# Altium PCB BRCM-V2-Master.PcbDoc
Units mm, origin at the board's own origin, x right, y up, seen from the top; angles counter-clockwise.
Board outline 80 x 80 mm, 2 copper layers (Top Layer, Bottom Layer); 95 components, 69 nets, 366 pads, 166 vias.
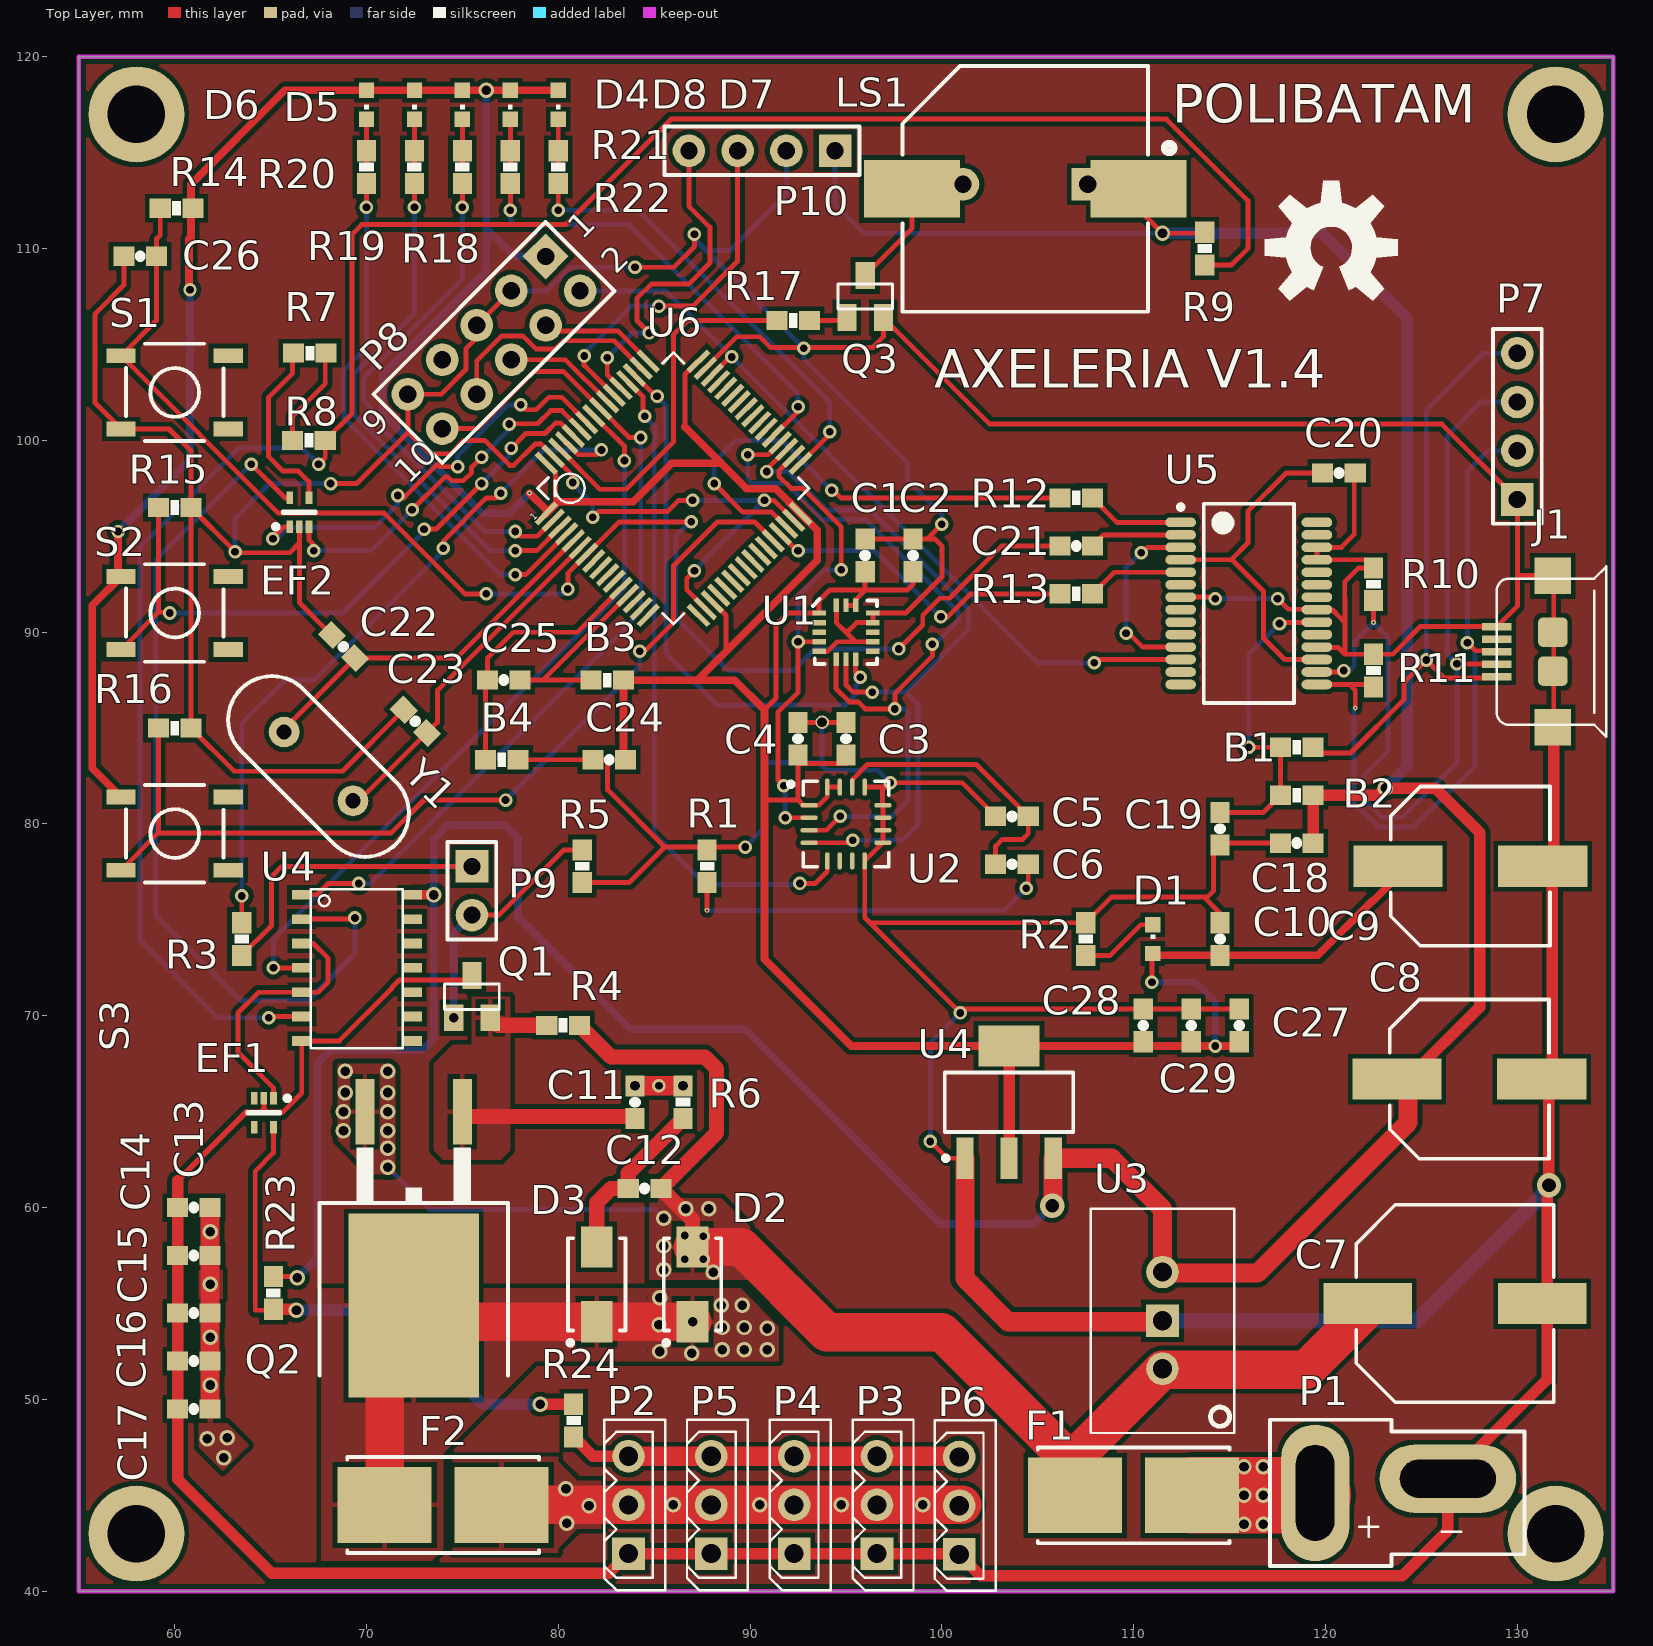
[diagram p0: Top Layer view]
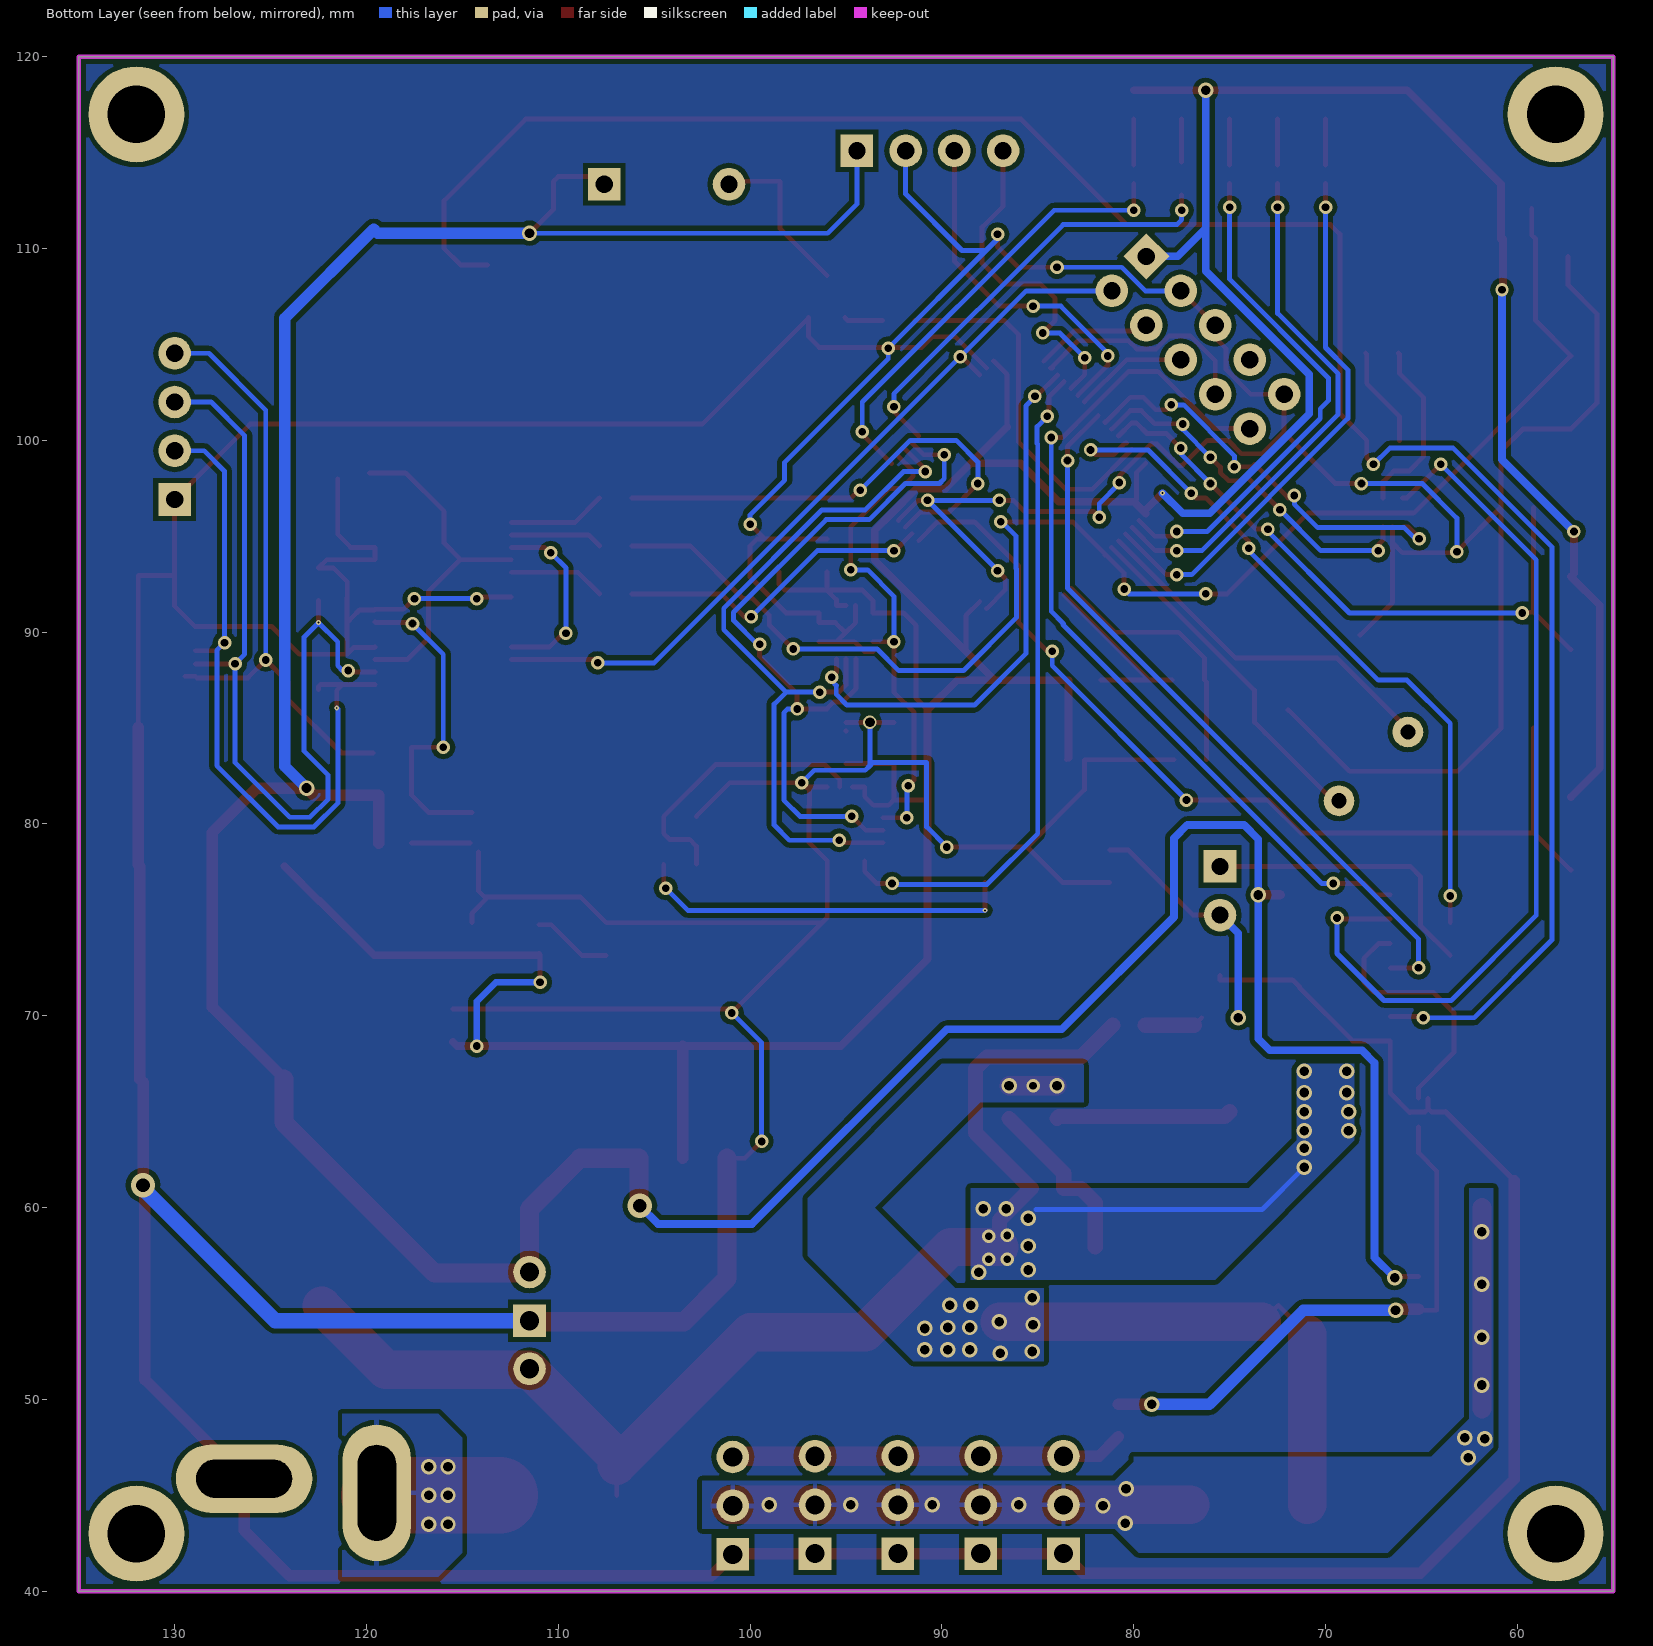
[diagram p1: Bottom Layer view, seen from below]

## Layer stack, top to bottom
Top Solder: solder mask 0.0102, Solder Resist, Dk 3.5
Top Layer: signal copper 0.0356
Dielectric 1: dielectric 0.32, FR-4, Dk 4.8
Bottom Layer: signal copper 0.0356
Bottom Solder: solder mask 0.0102, Solder Resist, Dk 3.5

## Board outline
55,40 55,120 135,120 135,40

## Design rules (kind name [scope] priority, off if disabled: settings)
Clearance [All] p1: gap=0.254 ignorepadtopadclearanceinfootprint=FALSE except(0: Arc-Hole Track-Hole SMDPad-Hole THPad-Hole Via-Hole Fill-Hole Poly-Hole Region-Hole Text-Hole)
PolygonConnect [All] p1: connectstyle=Relief reliefconductorwidth=0.254 reliefentries=4 polygonreliefangle="90 Angle" airgapwidth=0.254
RoutingVias [All] p1: holewidth=0.711 width=1.27 viastyle="Through Hole" minholewidth=0.711 minwidth=1.27 maxholewidth=0.711 maxwidth=1.27
SolderMaskExpansion [All] p1: expansion=0.102
Width [All] p1: maxlimit=0.254 minlimit=0.254 preferedwidth=0.254
30 further rules are at their usual default settings.

## Classes and differential pairs
component class "Dynamixel Power": C11 C12 C13 C14 C15 C16 C17 D2 D3 F2 P2 P3 P4 P5 P6 P9 Q1 Q2 R3 R4 R5 R6
component class Communication: B1 B2 C18 C19 C20 C21 EF1 J1 P7 R7 R8 R9 R10 R11 R12 R13 R23 R24 U4 U5
component class "IMU Sensor": C1 C2 C3 C4 C5 C6 R1 U1 U2 U?
component class "Power Conversion": C7 C8 C9 C10 D1 F1 P1 R2 U3 U4
component class "Main System": B3 B4 C22 C23 C24 C25 C26 C27 C28 C29 D4 D5 D6 D7 D8 EF2 LS1 P8 P10 Q3 R14 R15 R16 R17 R18 R19 R20 R21 R22 S1 S2 S3 U6 Y1

## Components (designator, comment, footprint, x,y, rotation, side; value= is the part's Value field where it differs from the comment)
B1 "BEAD" 0603-RES 118.5,84 r180 top value=100
B2 "BEAD" 0603-RES 118.5,81.5 r180 top value=100
B3 "BEAD" 0603-RES 82.55,87.5 r0 top value=100
B4 "BEAD" 0603-RES 77.05,83.35 r0 top value=100
C1 "Cap" 0603-CAP 96,94 r90 top value=100nF
C2 "Cap" 0603-CAP 98.5,94 r90 top value=100nF
C3 "Cap" 0603-CAP 95,84.45 r90 top value=100nF
C4 "Cap" 0603-CAP 92.5,84.45 r90 top value=10nF
C5 "Cap" 0603-CAP 103.65,80.4 r0 top value=10nF
C6 "Cap" 0603-CAP 103.65,77.9 r0 top value=470nF
C7 "330uF 35V" "CAP 330uF 35V SMD" 126.75,55 r0 top
C8 "220uF 16V" "CAP 220uF 16V" 127.5,66.7 r0 top
C9 "220uF 16V" "CAP 220uF 16V" 127.55,77.8 r0 top
C10 "Cap" 0603-CAP 114.5,74 r90 top value=100nF
C11 "Cap" 0603-CAP 84,65.5 r270 top value=10nF
C12 "Cap" 0603-CAP 84.5,61 r0 top value=1000nF
C13 "Cap" 0603-CAP 61,60 r0 top value=100nF
C14 "Cap" 0603-CAP 61,57.5 r0 top value=100nF
C15 "Cap" 0603-CAP 61,54.5 r0 top value=100nF
C16 "Cap" 0603-CAP 61,52 r0 top value=100nF
C17 "Cap" 0603-CAP 61,49.5 r0 top value=100nF
C18 "Cap" 0603-CAP 118.5,79 r0 top value=100nF
C19 "Cap" 0603-CAP 114.5,79.75 r90 top value=100nF
C20 "Cap" 0603-CAP 120.7,98.3 r180 top value=100nF
C21 "Cap" 0603-CAP 107,94.5 r180 top value=100nF
C22 "Cap" 0603-CAP 68.8,89.25 r135 top value=22pF
C23 "Cap" 0603-CAP 72.55,85.35 r135 top value=22pF
C24 "Cap" 0603-CAP 82.65,83.35 r0 top value=100nF
C25 "Cap" 0603-CAP 77.15,87.5 r0 top value=100nF
C26 "Cap" 0603-CAP 58.2,109.6 r0 top value=100nF
C27 "Cap" 0603-CAP 115.5,69.5 r270 top value=100nF
C28 "Cap" 0603-CAP 110.5,69.5 r270 top value=100nF
C29 "Cap" 0603-CAP 113,69.5 r270 top value=100nF
D1 "LED" CHIPLED_0603 111,74 r0 top
D2 "DIODA" "DIODE SS14 SODFL" 87,56 r90 top
D3 "DIODA" "DIODE SS14 SODFL" 82,56 r90 top
D4 "LED" CHIPLED_0603 75,117.5 r180 top
D5 "LED" CHIPLED_0603 72.5,117.5 r180 top
D6 "LED" CHIPLED_0603 70,117.5 r180 top
D7 "LED" CHIPLED_0603 80,117.5 r180 top
D8 "LED" CHIPLED_0603 77.5,117.5 r180 top
EF1 "EMI FILTER DUAL CHANNEL" "Emi Filter Dual Channel SOTFL" 64.65,64.95 r270 top
EF2 "EMI FILTER DUAL CHANNEL" "Emi Filter Dual Channel SOTFL" 66.5,96.25 r90 top
F1 "LitleFuse" LitleFuse 110,45 r180 top
F2 "LitleFuse" LitleFuse 74,44.5 r0 top
J1 "MICRO USB" USB_MICRO 131.469,88.984 r90 top
LS1 "Buzzer" ABSM-1574 110.25,113.11 r180 top
P1 "DEANS JACK" "Deans Jack" 122,46 r90 top
P2 "DXL" DXL 83.661,41.962 r90 top
P3 "DXL" DXL 96.615,41.962 r90 top
P4 "DXL" DXL 92.297,41.962 r90 top
P5 "DXL" DXL 87.979,41.962 r90 top
P6 "DXL" DXL 100.9,41.92 r90 top
P7 "Header 4" HDR1X4 130,96.92 r90 top
P8 "Header 5X2" HDR2X5 79.342,109.592 r225 top
P9 "Header 2" HDR1X2 75.5,77.79 r270 top
P10 "CEK_DATA" HDR1X4 94.43,115.1 r180 top
Q1 "NMOS" SOT23 75.5,71 r0 top
Q2 "PMOS" TO263 72.46,58.4 r180 top
Q3 "NPN" SOT23 96,107.5 r0 top
R1 "Res" 0603-RES 87.757,77.8 r90 top value=10K
R2 "Res" 0603-RES 107.5,74 r270 top value=1K
R3 "Res" 0603-RES 63.5,74 r270 top value=10K
R4 "Res" 0603-RES 80.25,69.5 r0 top value=47K
R5 "Res" 0603-RES 81.25,77.8 r90 top value=47K
R6 "Res" 0603-RES 86.5,65.5 r270 top value=22K
R7 "Res" 0603-RES 67.05,104.55 r0 top value=1K
R8 "Res" 0603-RES 67,100 r0 top value=0
R9 "Res" 0603-RES 113.7,110 r90 top value=10K
R10 "Varistor" 0603-RES 122.5,92.5 r270 top value=0
R11 "Varistor" 0603-RES 122.5,88 r270 top value=0
R12 "Res" 0603-RES 107,97 r180 top value=0
R13 "Res" 0603-RES 107,92 r180 top value=0
R14 "Res" 0603-RES 60.1,112.1 r180 top value=10K
R15 "Res" 0603-RES 60,96.5 r180 top value=10K
R16 "Res" 0603-RES 60,85 r180 top value=10K
R17 "Res" 0603-RES 92.25,106.25 r180 top value=10K
R18 "Res" 0603-RES 75,114.25 r90 top value=220
R19 "Res" 0603-RES 72.5,114.25 r90 top value=220
R20 "Res" 0603-RES 70,114.25 r90 top value=220
R21 "Res" 0603-RES 80,114.25 r90 top value=220
R22 "Res" 0603-RES 77.5,114.25 r90 top value=220
R23 "Res" 0603-RES 65.15,55.55 r90 top value=10K
R24 "Res" 0603-RES 80.8,48.9 r270 top value=0
S1 "SW-PB" TACTILE-SWITCH-SMD 60,102.5 r0 top
S2 "SW-PB" TACTILE-SWITCH-SMD 60,91 r0 top
S3 "SW-PB" TACTILE-SWITCH-SMD 60,79.5 r0 top
U1 "3-axis 6/12/24g SPI/I2C accelerometer" LGA16-3MM 95,90 r0 top
U2 "L3G4200D" L3G4200D 95,80 r0 top
U3 "DC/DC Converter" "DC/DC Converter" 111.5,54.1 r90 top
U4 "Regulator 3V3" "Regulator 3V3 SOT230" 103.5,65.5 r90 top
U4 "74HC126D" 14-SOIC 69.5,72.5 r0 top
U5 "FT232RL" "USB TO SERIAL FT232RL SOP" 116,91.5 r0 top
U6 "ARM-based 32-bit MCU" QFP-64N 86,97.5 r45 top
Y1 "XTAL" HC49US 67.5,83 r315 top

## Footprints (in the part's own frame and the unit in brackets; to place one, negate y for a bottom-side part, rotate by r counter-clockwise, add the part's x,y. Pads: shape width x height; smd on the part's side, far side on the other; paste and mask are expansions set on the pad)
14-SOIC [mil]
  rect 40x20 smd: 1(-113.19,150) 2(-113.19,100) 3(-113.19,50) 4(-113.19,0) 5(-113.19,-50) 6(-113.19,-100) 7(-113.19,-150) 8(113.19,-150) 9(113.19,-100) 10(113.19,-50) 11(113.19,0) 12(113.19,50) 13(113.19,100) 14(113.19,150)
  silkscreen extent -94,-165 94,161
0603-CAP [mm]
  rect 1.1x1 smd: 1(-0.85,0) 2(0.85,0)
  silkscreen extent 0,-0.03 0,0.03
0603-RES [mm]
  rect 1.1x1 smd: 1(-0.85,0) 2(0.85,0)
  silkscreen extent -0.23,-0.38 0.23,0.38
ABSM-1574 [mm] "Magnetic Transducer Buzzer"
  rect 5x3 smd: 1(0,0) 2(11.8,0)
  rect 1.7x1.7 hole 0.9: 1A(2.65,-0.24)
  round 1.7 hole 0.9: 2A(9.15,-0.24)
  silkscreen extent -1.83,-6.4 12.3,6.4
"CAP 220uF 16V" [mm] "Aluminum Electrolytic Capacitor, Body 8,20x8,20x10,20mm, IPC Low Density"
  rect 4.65x2.15 smd: 1(-3.775,0) 2(3.775,0)
  silkscreen extent -4.15,-4.15 4.15,4.15, body extent -4.15,-4.15 4.15,4.15, height 10.2
"CAP 330uF 35V SMD" [mm] "Aluminum Electrolytic Capacitor, Body 10,20x10,20x10,20mm, IPC Low Density"
  rect 4.6x2.15 smd: 1(-4.55,0) 2(4.55,0)
  silkscreen extent -5.15,-5.15 5.15,5.15, body extent -5.15,-5.15 5.15,5.15, height 10.2
CHIPLED_0603 [mil]
  rect 31.5x31.5 smd: 1(0,-29.53) 2(0,29.53)
  silkscreen extent -5,0 5,10
"DC/DC Converter" [mm]
  round 1.7 hole 1: 1(-2.5,0) 3(2.54,0)
  rect 1.7x1.7 hole 1: 2(0,0)
  silkscreen extent -5.85,-3.75 5.85,3.75
"Deans Jack" [mil]
  oval 280x140 hole 78.74 slot 196.85 at 0 deg: 1(-34.25,100)
  oval 140x280 hole 78.74 slot 196.85 at 90 deg: 2(-5.25,-172.5)
  silkscreen extent -184,-330 116,193
"DIODE SS14 SODFL" [mm] "SODFL, 2-Leads, Body 2,73x5,20mm, IPC Medium Density"
  rect 2.15x1.65 smd: 1(-1.95,0) 2(1.95,0)
  silkscreen extent -3.17,-1.5 2.4,1.5, body extent -2.38,-1.48 2.37,1.48, height 2.7
DXL [mm]
  rect 1.7x1.7 hole 1: 1(0,0)
  round 1.7 hole 1: 2(2.54,0) 3(5.08,0)
  silkscreen extent -1.9,-1.9 6.99,1.27
"Emi Filter Dual Channel SOTFL" [mm] "SOTFL, 5-Leads, Body 1,60x1,60mm, Pitch 0,50mm, IPC Medium Density"
  rect 0.65x0.35 smd: 1(-0.75,0.5) 2(-0.75,0) 3(-0.75,-0.5) 4(0.75,-0.5) 5(0.75,0.5)
  silkscreen extent -0.87,-0.85 0.05,1.35, body extent -0.65,-0.85 0.65,0.85, height 0.6
HC49US [mm]
  round 1.6 hole 0.8: 1(-2.54,0) 2(2.54,0)
  silkscreen extent -5.71,-2.29 5.71,2.29, body extent -5.55,-2.32 5.62,2.35, height 3.63
HDR1X2 [mm] "Connector; Header; 2 Position"
  rect 1.7x1.7 hole 0.9: 1(0,0)
  round 1.7 hole 0.9: 2(2.54,0)
  silkscreen extent -1.27,-1.27 3.81,1.27
HDR1X4 [mm] "Connector; Header; 4 Position"
  rect 1.7x1.7 hole 0.9: 1(0,0)
  round 1.7 hole 0.9: 2(2.54,0) 3(5.08,0) 4(7.62,0)
  silkscreen extent -1.27,-1.27 8.89,1.27
HDR2X5 [mm] "Connector; Header; 5x2 Position"
  rect 1.7x1.7 hole 0.9: 1(0,0)
  round 1.7 hole 0.9: 2(0,2.54) 3(2.54,0) 4(2.54,2.54) 5(5.08,0) 6(5.08,2.54) 7(7.62,0) 8(7.62,2.54) 9(10.16,0) 10(10.16,2.54)
  silkscreen extent -1.27,-1.27 11.43,3.81
L3G4200D [mm] "QFN, 16-Leads, Body 4,00x4,00mm, Pitch 0,65mm, Thermal Pad 2,03x2,03mm, IPC Medium Density"
  oval 0.9x0.25 smd: 1(-1.925,0.975) 2(-1.925,0.325) 3(-1.925,-0.325) 4(-1.925,-0.975) 9(1.925,-0.975) 10(1.925,-0.325) 11(1.925,0.325) 12(1.925,0.975)
  oval 0.25x0.9 smd: 5(-0.975,-1.925) 6(-0.325,-1.925) 7(0.325,-1.925) 8(0.975,-1.925) 13(0.975,1.925) 14(0.325,1.925) 15(-0.325,1.925) 16(-0.975,1.925)
  silkscreen extent -3,-2.22 2.22,2.22, body extent -2.07,-2.07 2.07,2.07, height 1.1
LGA16-3MM [mm]
  rect 0.7x0.28 smd: 1(-1.4,1) 2(-1.4,0.5) 3(-1.4,0) 4(-1.4,-0.5) 5(-1.4,-1) 9(1.4,-1) 10(1.4,-0.5) 11(1.4,0) 12(1.4,0.5) 13(1.4,1)
  rect 0.28x0.7 smd: 6(-0.5,-1.4) 7(0,-1.4) 8(0.5,-1.4) 14(0.5,1.4) 15(0,1.4) 16(-0.5,1.4)
  silkscreen extent -1.73,-1.65 1.62,1.72
LitleFuse [mm] "Molded Capacitor, 2-Leads, Body 9,75x4,65mm, IPC Medium Density"
  rect 4.9x3.95 smd: 1(-3.05,0) 2(3.05,0)
  silkscreen extent -5,-2.5 5,2.5, body extent -5,-2.5 5,2.5, height 4
QFP-64N [mil]
  rect 58x11 smd: 1(-221,148) 2(-221,128) 3(-221,108) 4(-221,89) 5(-221,69) 6(-221,49) 7(-221,30) 8(-221,10) 9(-221,-10) 10(-221,-30) 11(-221,-49) 12(-221,-69) 13(-221,-89) 14(-221,-108) 15(-221,-128) 16(-221,-148) 33(221,-148) 34(221,-128) 35(221,-108) 36(221,-89) 37(221,-69) 38(221,-49) 39(221,-30) 40(221,-10) 41(221,10) 42(221,30) 43(221,49) 44(221,69) 45(221,89) 46(221,108) 47(221,128) 48(221,148)
  rect 11x58 smd: 17(-148,-221) 18(-128,-221) 19(-108,-221) 20(-89,-221) 21(-69,-221) 22(-49,-221) 23(-30,-221) 24(-10,-221) 25(10,-221) 26(30,-221) 27(49,-221) 28(69,-221) 29(89,-221) 30(108,-221) 31(128,-221) 32(148,-221) 49(148,221) 50(128,221) 51(108,221) 52(89,221) 53(69,221) 54(49,221) 55(30,221) 56(10,221) 57(-10,221) 58(-30,221) 59(-49,221) 60(-69,221) 61(-89,221) 62(-108,221) 63(-128,221) 64(-148,221)
  silkscreen extent -197,-197 197,197
"Regulator 3V3 SOT230" [mm] "SOT223, 4-Leads, Body 6,50x7,00mm (avg), Pitch 2,30mm, IPC Medium Density"
  rect 2.15x0.9 smd: 1(-2.925,2.3) 2(-2.925,0) 3(-2.925,-2.3)
  rect 2.15x3.2 smd: 4(2.925,0)
  silkscreen extent -3.05,-3.35 1.55,3.42, body extent -1.85,-3.35 1.85,3.35, height 1.8
SOT23 [mm]
  rect 1x1.4 smd: 1(-0.95,-1.1) 2(0.95,-1.1) 3(0,1.1)
  silkscreen extent -1.42,-0.66 1.42,0.66
TACTILE-SWITCH-SMD [mil]
  rect 60x30 smd: 1(-110,75) 2(110,75) 3(-110,-75) 4(110,-75)
  silkscreen extent -100,-100 100,100
TO263 [mm]
  rect 1x3.4 smd: 1(-2.54,-6.6) 2(2.54,-6.6)
  rect 6.8x9.6 smd: 3(0,3.5)
  silkscreen extent -4.92,-4.74 4.92,7.17
"USB TO SERIAL FT232RL SOP" [mm] "SOP, 28-Leads, Body 10,25x5,40mm, Pitch 0,65mm, IPC Medium Density"
  oval 1.6x0.5 smd: 1(-3.55,4.225) 2(-3.55,3.575) 3(-3.55,2.925) 4(-3.55,2.275) 5(-3.55,1.625) 6(-3.55,0.975) 7(-3.55,0.325) 8(-3.55,-0.325) 9(-3.55,-0.975) 10(-3.55,-1.625) 11(-3.55,-2.275) 12(-3.55,-2.925) 13(-3.55,-3.575) 14(-3.55,-4.225) 15(3.55,-4.225) 16(3.55,-3.575) 17(3.55,-2.925) 18(3.55,-2.275) 19(3.55,-1.625) 20(3.55,-0.975) 21(3.55,-0.325) 22(3.55,0.325) 23(3.55,0.975) 24(3.55,1.625) 25(3.55,2.275) 26(3.55,2.925) 27(3.55,3.575) 28(3.55,4.225)
  silkscreen extent -3.67,-5.2 2.35,5.2, body extent -2.75,-5.2 2.75,5.2, height 2
USB_MICRO [mil]
  rect 14.96x59.84 smd: 1(-51.18,100) 2(-25.59,100) 3(0,100) 4(25.59,100) 5(51.18,100)
  rect 74.8x74.8 smd: 6(-155.51,-15) 7(155.51,-15)
  rrect30% 60x60 smd: 8(-40,-15) 9(40,-15)
  silkscreen extent -175,-125 175,100

## Part data
B1 B2 B3 B4 R10 R11: library part Res, "Resistor", LatestRevisionDate=17-Jul-2002, LatestRevisionNote="Re-released for DXP Platform.", PackageDescription="Axial Device, Thru-Hole; 2 Leads; 0.3 in Pin Spacing", PackageReference=AXIAL-0.3, Published=8-Jun-2000, Publisher="Altium Limited"
C1 C2 C3 C4 C5 C6 C10 C11 C12 C13 C14 C15 C16 C17 C18 C19 C20 C21 C22 C23 C24 C25 C26 C27 C28 C29: "Capacitor", LatestRevisionDate=17-Jul-2002, LatestRevisionNote="Re-released for DXP Platform.", PackageDescription="Radial Cap, Thru-Hole; 2 Leads; 0.3 in Pin Spacing", PackageReference=RAD-0.3, Published=8-Jun-2000, Publisher="Altium Limited"
D1 D4 D5 D6 D7 D8: "Typical INFRARED GaAs LED", LatestRevisionDate=08-Jul-2005, LatestRevisionNote="Mech Layer 1 removed.", PackageDescription="LED; 2 Leads", PackageReference=LED-0, Published=8-Jun-2000, Publisher="Altium Limited"
LS1: "Magnetic Transducer Buzzer", ComponentLink1Description="Manufacturer Link", ComponentLink1URL=http://www.megastar.com/linecard/buzzmode/index.php, DatasheetVersion=17-Dec-2003, LatestRevisionDate=17-Dec-2003, LatestRevisionNote="Schematic revised, PCB Footprint replaced.", PackageDescription="Magnetic Transducer Buzzer", PackageReference=ABSM-1574, Published=24-Mar-1999, Publisher="Altium Limited"
P7: "Header, 4-Pin", LatestRevisionDate=17-Jul-2002, LatestRevisionNote="Re-released for DXP Platform.", Publisher="Altium Limited"
P8: "Header, 5-Pin, Dual row", LatestRevisionDate=17-Jul-2002, LatestRevisionNote="Re-released for DXP Platform.", Publisher="Altium Limited"
P9: "Header, 2-Pin", LatestRevisionDate=17-Jul-2002, LatestRevisionNote="Re-released for DXP Platform.", Publisher="Altium Limited"
P10: library part "Header 4", "Header, 4-Pin", LatestRevisionDate=17-Jul-2002, LatestRevisionNote="Re-released for DXP Platform.", Publisher="Altium Limited"
Q1: "N-Channel Power MOSFET", ComponentLink1Description="Manufacturer Link", ComponentLink1URL=http://www.irf.com/, DatasheetVersion=PD-9.814, LatestRevisionDate=17-Jul-2002, LatestRevisionNote="Re-released for DXP Platform.", Note="Pin 2 is electrically connected to pin 4.", PackageDescription="TO, Thru-Hole, Vertical, Heatsink Mounted; 3 In-Line Leads; Pitch 2.54 mm", PackageReference=TO-220AB, PackageVersion=Feb-1997, Published=8-Jun-2000, Publisher="Altium Limited"
Q2: "P-Channel Power MOSFET", ComponentLink1Description="Manufacturer Link", ComponentLink1URL=http://www.irf.com/, DatasheetVersion=PD-9.390D, LatestRevisionDate=17-Jul-2002, LatestRevisionNote="Re-released for DXP Platform.", Note="Pin 4 not drawn and electrically connected to Pin 2.", PackageDescription="TO, Thru-Hole, Vertical, Heatsink Mounted; 3 In-Line Leads; Pitch 2.54 mm", PackageReference=TO-220AB, PackageVersion=Feb-1997, Published=8-Jun-2000, Publisher="Altium Limited"
Q3: "NPN Bipolar Transistor", Code_JEDEC=TO-226-AA, LatestRevisionDate=17-Jul-2002, LatestRevisionNote="Re-released for DXP Platform.", PackageDescription="TO, Flat Index; 3 In-Line, Axial Leads; Body Dia. 4.8mm; Leads 0.55 x 0.51 mm (max)", PackageReference=TO-226-AA, Published=8-Jun-2000, Publisher="Altium Limited"
R1 R2 R3 R4 R5 R6 R7 R8 R9 R12 R13 R14 R15 R16 R17 R18 R19 R20 R21 R22 R23 R24: "Resistor", LatestRevisionDate=17-Jul-2002, LatestRevisionNote="Re-released for DXP Platform.", PackageDescription="Axial Device, Thru-Hole; 2 Leads; 0.3 in Pin Spacing", PackageReference=AXIAL-0.3, Published=8-Jun-2000, Publisher="Altium Limited"
S1 S2 S3: "Switch", LatestRevisionDate=17-Jul-2002, LatestRevisionNote="Re-released for DXP Platform.", PackageDescription="Switch; 2 Leads", PackageReference=SPST-2, Published=24-Mar-1999, Publisher="Altium Limited"
U1: library part LIS331
U4: "Quadruple Bus Buffer Gate with 3-State Outputs", Code_IPC=SOIC127P600-14, ComponentLink1Description="Manufacturer Link", ComponentLink1URL=http://www.ti.com/, ComponentLink2Description=Datasheet, ComponentLink2URL=http://www-s.ti.com/sc/ds/sn74ahct126.pdf, DatasheetVersion=Oct-1998, LatestRevisionDate=13-Apr-2006, LatestRevisionNote="IPC-7351 Footprint Added.", PackageDescription="14-Pin Small Outline Integrated Circuit 1.27 mm Pitch", PackageReference=D014, PackageVersion=Jan-1998, Published=8-Jun-2000, Publisher="Altium Limited"
U6: library part STM32F103RET6, PACKAGE=QFP-64, MPN=STM32F103RET6, OC_FARNELL=1624138, OC_NEWARK=01P4101, SUPPLIER=STMICROELECTRONICS
Y1: "Crystal Oscillator", LatestRevisionDate=17-Jul-2002, LatestRevisionNote="Re-released for DXP Platform.", PackageDescription="Crystal, Thru-Hole; 2 Leads; Body 3.1 x 8.2 mm (Dia.xH)", PackageReference=R38, Published=8-Jun-2000, Publisher="Altium Limited"

## Free pads (board coordinates)
  round 5 hole 3: 9(58,117) 10(132,117) 11(132,43) 12(58,43)

## Via types
v1: diameter 0.705, hole 0.4, Top Layer to Bottom Layer, 98 vias
v2: diameter 0.805/0.805 (per signal layer), hole 0.5, Top Layer to Bottom Layer, 52 vias
v3: diameter 0.805, hole 0.5, Top Layer to Bottom Layer, 7 vias
v4: diameter 0.25, hole 0.1, Top Layer to Bottom Layer, 4 vias
v5: diameter 1.27, hole 0.711, Top Layer to Bottom Layer, 2 vias
v6: diameter 0.7, hole 0.4, Top Layer to Bottom Layer, 2 vias
v7: diameter 0.705, hole 0.5, Top Layer to Bottom Layer, 1 vias

## Nets (pads, with @x,y where several pads share a name; then routed paths per layer and width w, separated by ;. In a path a pad name is that pad's centre, name@x,y a point inside that pad or via, vN(x,y) a via of type N, cw(c..) or ccw(c..) an arc to the next point about the centre after c; other vN are vias at no path point)
3V3: B3.2 C1.1 C2.1 C3.1 C4.1 C9.1 C10.1 C24.2 C27.2 C28.2 C29.2 D1.1 D4.1 D5.1 D6.1 D7.1 D8.1 P8.1 R14.1 S2.1 S3.1 U1.1 U1.14 U1.15 U2.1 U2.15 U2.16 U4.2@103.5,62.575 U4.4@103.5,68.425 U6.1 U6.19 U6.32 U6.48 U6.64 | length 235
  Top Layer w0.254: S2.1@57.05,93.061 S2.1 ; v6@60.75,107.9 v6(60.8,107.85) ; U6.1 U6.1@79.373,96.377 ; U6.64 79.85,98.334 79.85,96.934 79.975,96.809 ; C24.2@83.4,83.45 C24.2 ; 86.6,100.7 86.6,103.434 U6.48@87.302,104.136 ; U6.19 88.75,90.871 88.75,89 ; 90.75,81.25 92.5,81.25 ; 90.75,85.956 91.35,86.556 91.35,90.356 91.994,91 U1.1 93.6,91.65 94.15,92.2 96,92.2 ; U2.15 U2.16 94.025,81.425 93.575,80.975 U2.1 92.775,80.975 92.5,81.25 ; C3.1@95,83.15 92.5,83.15 92.5,81.25 ; U1.15 U1.14 95.5,91.7 96,92.2 ; C1.1 96,92.2 ; C2.1 98.5,92.5 98.2,92.2 96,92.2 ; v1(110.95,71.75) 110.95,73.2 D1.1 D1.1@111.1,73.15
  Top Layer w0.4: S2.1@57.05,93.061 v6(57.05,95.25) ; S3.1 55.7,82.911 55.7,91.399 S2.1 ; v6@60.75,107.9 60.75,110.5 ; 60.85,110.5 60.85,113.35 65.75,118.25 D6.1 D5.1 D4.1 D8.1 D7.1 ; v4(78.5,97.25) U6.1@79.373,96.377 ; U6.1 79.984,96.8 83.9,96.8 85.907,98.807 88.494,98.807 ; C24.2@83.4,83.45 B3.2 87.25,87.5 ; 86.6,100.7 88.494,98.807 ; D1.1@111.1,73.15 C10.1 119.6,73.15 122.45,76 ; C27.2 115.275,68.425 v1(114.25,68.425) 103.5,68.425 95.275,68.425 90.75,72.95 90.75,81.25 90.75,85.956 89.206,87.5 87.25,87.5 ; 122.425,75.95 C9.1@124.275,77.8 ; 87.25,87.5 88.75,89 93.5,93.75 93.5,95.316 U6.32 91.333,97.483 89.817,97.483 88.494,98.807
  Top Layer w0.6: U4.2@103.5,62.575 U4.4@103.5,68.425
  Bottom Layer w0.354: v1(110.95,71.75) 113.25,71.75 114.25,70.75 v1(114.25,68.425)
  Bottom Layer w0.4: v6(57.05,95.25) 60.8,99 v6(60.8,107.85) ; v3(76.25,118.25) 76.25,111.05 ; v4(78.5,97.25) 77.45,96.2 76.036,96.2 70.854,101.382 70.854,103.435 76.25,108.832 76.25,111.05 ; P8.1 77.708,109.592 76.25,111.05
58: EF2.1 U6.58 | length 22.2
  Top Layer w0.254: v1(65.125,94.875) 65.125,94.925 65.7,95.5 EF2.1@65.944,95.5 ; v1(71.626,97.126) 71.824,97.126 71.95,97 73.7,98.75 73.824,98.626 v1(74.751,98.626) ; v1(78.05,101.85) 78.3,101.6 78.85,101.6 79.5,102.25 80.172,102.25 U6.58 U6.58@81.492,100.958
  Bottom Layer w0.254: v1(65.125,94.875) 65.325,94.875 65.9,95.45 70.4,95.45 71.626,96.676 v1(71.626,97.126) ; v1@74.618,98.668 v1@74.618,98.781 ; v1(74.751,98.626) 74.751,99.201 77.4,101.85 v1(78.05,101.85)
59: EF2.3 U6.59 | length 19.6
  Top Layer w0.254: 67,94.8 EF2.3 ; 67.008,94.8 67.008,94.792 67.25,94.55 v1(67.25,94.25) ; v1(72.375,96.375) 74.1,98.1 74.239,98.1 74.447,97.892 75.054,97.892 75.484,98.322 75.484,98.609 v1(76,99.125) ; v1(77.45,100.85) 77.466,100.866 78.916,100.866 79.6,101.55 80.19,101.55 U6.59
  Bottom Layer w0.254: v1(67.25,94.25) 70.25,94.25 v1(72.375,96.375) ; v1@75.825,99.075 75.887,99.013 76,98.9 v1(76,99.125) 77.45,100.575 v1(77.45,100.85)
ACC_CS: U1.8 U6.51 | length 28.5
  Top Layer w0.254: U6.51 85.08,102.3 v1(85.15,102.3) ; U1.8 95.5,87.899 v1(95.75,87.65)
  Bottom Layer w0.254: v1(85.15,102.3) 85.15,102.268 85.625,101.793 85.625,93.531 85.608,93.514 85.608,88.892 88.3,86.2 94.95,86.2 95.506,86.756 95.506,87.21 95.5,87.216 95.75,87.465 v1(95.75,87.65)
BOOT: R15.2 S2.3 U6.60 | length 34.9
  Top Layer w0.254: S2.3 59.15,91.039 ; R15.2 59.15,91.039 ; v1(59.75,91) 59.711,91.039 59.15,91.039 ; v1(73,95.375) 73.625,95.375 v1(76,97.75) ; v1(77.55,99.6) 78.308,100.358 79.308,100.358 79.85,100.9 80.121,100.9 U6.60
  Bottom Layer w0.254: v1(59.75,91) 68.75,91 73.125,95.375 v1(73,95.375) ; v1@76,97.968 v1(76,97.75) 77.55,99.3 v1(77.55,99.6)
BOOT1: R16.2 S3.3 U6.28 | length 49.6
  Top Layer w0.254: S3.3 59.15,79.539 ; R16.2 59.15,79.539 ; v1(77.25,81.25) 73,81.25 71.289,79.539 59.15,79.539 ; v1(84.25,89) 84.5,89 86,90.5 86,93.45 88.3,95.75 90.229,95.75 U6.28
  Bottom Layer w0.254: v1(77.25,81.25) 84.25,88.25 v1(84.25,89)
BUZZER: R17.2 U6.62 | length 19.1
  Top Layer w0.254: U6.62 82.171,97.45 83.55,97.45 86,99.9 86,105.5 86.75,106.25 R17.2
CPU_RXD: U6.43
DXL_RXD: EF2.4 R7.1 | length 9.4
  Top Layer w0.254: R7.1 66.15,104.5 66.15,103.5 64.9,102.25 64.9,99.15 65.65,98.4 66.45,98.4 67,97.85 EF2.4
DXL_TXD: EF2.5 U4.2@66.625,75.04 | length 46.2
  Top Layer w0.254: v1(64,98.75) 65.75,97 EF2.5 ; U4.2@66.625,75.04 69.34,75.04 v1(69.4,75.1)
  Bottom Layer w0.254: v1(64,98.75) 59.016,93.767 59.016,75.234 63.45,70.8 66.95,70.8 69.4,73.25 v1(69.4,75.1)
ENA_DXL_PWR: R3.1 U6.61 | length 37.6
  Top Layer w0.254: R3.1 v1(63.5,76.25) ; v1(74,94.375) 74,94.75 76.25,97 76.75,97 v1(77,97.25) ; U6.61@80.379,99.871 U6.61 81.053,99.25 82,99.25 v1(82.25,99.5)
  Bottom Layer w0.254: v1(63.5,76.25) 63.5,85.25 65.75,87.5 67.25,87.5 74,94.25 v1(74,94.375) ; v1(77,97.25) 79.25,99.5 v1(82.25,99.5)
ENA_RX: U4.4@66.625,72.5 U6.57 | length 38.5
  Top Layer w0.254: v1(65.15,72.5) U4.4@66.625,72.5 ; U6.57 83.45,99.691 v1(83.45,98.95)
  Bottom Layer w0.254: v1(65.15,72.5) 65.15,74 83.45,92.3 v1(83.45,98.95)
ENA_TX: P8.10 U4.1@66.625,76.31 U6.56 | length 46
  Top Layer w0.254: U4.1@66.625,76.31 67.41,76.31 68,76.9 v1(69.6,76.9) ; P8.10 75.762,100.612 78.75,103.6 80.259,103.6 U6.56 ; U6.56 83.709,100.15 v1(84.3,100.15)
  Bottom Layer w0.254: v1(69.6,76.9) 70.2,76.9 83.7,90.4 83.659,90.441 84.3,91.082 v1(84.3,100.15)
GND: B4.2 C1.2 C2.2 C3.2 C4.2 C5.1 C7.2 C8.2 C9.2 C10.2 C13.1 C14.1 C15.1 C16.1 C17.1 C18.1 C19.1 C20.1 C22.2 C23.2 C24.1 C26.1 C27.1 C28.1 C29.1 EF1.2 EF2.2 J1.5 J1.6 J1.7 J1.8 J1.9 P1.2 P2.1 P3.1 P4.1 P5.1 P6.1 P7.1 P8.3 P8.5 P8.9 P10.2 Q1.3 Q3.2 R1.2 R2.1 R5.1 R10.1 R11.1 R15.1 R16.1 S1.3 U1.5 U1.10 U1.12 U1.13 U1.16 U2.8 U2.9 U2.10 U2.11 U2.12 U2.13 U3.2 U4.1@101.2,62.575 U4.7 U5.7 U5.18 U5.21 U5.25 U5.26 U6.18 U6.31 U6.47 U6.63 | length 568.5
  Top Layer w0.254: C26.1 57.35,108.1 55.85,106.6 55.85,101.951 S1.3 59.705,100.595 60.85,99.45 R15.1 ; 63.744,64.994 64.483,64.994 64.65,65.161 ; EF1.2 64.65,65.161 ; EF2.2 66.5,94.65 ; v1(68.125,97.75) 69.5,97.75 72.158,100.408 72.158,100.442 ; C22.2 66.5,91.55 66.5,94.65 ; C23.2 68.748,82.75 63.1,82.75 R16.1 R15.1 ; Q1.3 75.5,71.865 71.709,71.865 71.322,71.478 71.322,71.422 68.59,68.69 U4.7 66.625,65.975 65.6,64.95 65.556,64.994 64.817,64.994 64.65,65.161 ; P8.3 P8.5 75.75,105.35 75.185,104.785 75.185,103.694 73.899,102.408 P8.9 72.158,100.442 ; B4.2 C24.1 82.569,83.35 82.569,81.781 85.55,78.8 ; v1(80.75,97.8) 80.75,98.152 U6.63 79.052,99.85 79.014,99.812 78.793,99.812 77.681,98.7 77.462,98.7 76.162,100 75.083,100 74.383,99.3 73.3,99.3 72.158,100.442 ; R5.1 83.7,76.95 85.55,78.8 ; v1(81.8,96) 82.1,96.3 85.7,96.3 86.275,96.875 v1(87,96.875) ; v1(84,109.027) 86.027,109.027 87.1,110.1 v1(87.1,110.75) ; v1(87.1,93.2) 86.7,92.8 86.7,92.202 U6.18 ; U6.47 89.302,105.4 90.5,105.4 91.05,104.85 96.4,104.85 96.95,105.4 Q3.2 102.5,100.85 126.07,100.85 P7.1 130,91.355 128.945,90.3 124.95,90.3 123.5,88.85 R11.1 121.008,88.85 ; v1(89.75,78.8) 85.55,78.8 ; v1(90.75,96.875) 91.223,96.875 U6.31 ; C4.2 v7(93.75,85.3) C3.2 ; U1.5 94.05,89 94.55,89.5 95.5,89.5 ; U1.16 94.5,90.5 95.025,89.975 ; U2.13 v1@97.075,81.925 ; C1.2 C2.2 99.225,94.85 ; U1.10 95.5,89.5 ; U1.12 95.55,90.5 95.025,89.975 ; U1.12@96.4,90.521 U1.13 98.125,91 100,92.875 100,94.5 99.65,94.85 99.225,94.85 ; v1(99.4,63.45) 100.275,62.575 U4.1@101.2,62.575 ; v1(100,95.625) 99.225,94.85 ; P6.1@100.858,41.962 P6.1 ; C5.1 101.05,82.15 v1(97.3,82.15) v1@97.075,81.925 ; U5.7 114.175,91.825 v1(114.25,91.75) ; C19.1@114.15,78.55 114.15,76.5 113.85,76.2 113.65,76.2 ; C10.2 114.5,75.35 113.65,76.2 ; C19.1@114.6,79 C18.1 ; C27.1 C29.1 C28.1 101.15,70.35 v1(100.95,70.15) 96.25,74.85 ; v1(117.5,91.75) 118.056,91.194 119.531,91.194 U5.21 119.569,91.156 120.361,91.156 120.731,90.786 120.731,90.777 121.008,90.5 ; U5.18 119.569,89.206 120.652,89.206 121.008,88.85 ; C20.1@121.5,98 121.5,95.1 120.825,94.425 U5.26 U5.25 122.075,93.775 R10.1 121.725,93.35 121,92.625 121,91.833 121.008,91.824 121.008,90.5 ; 130.15,92.95 131.9,92.95 J1.6@131.9,85.034 ; v5@131.55,61.075 v5(131.65,61.175) ; C8.2@131.65,66.525 C8.2@131.825,66.7 ; R15.1 v1(63.15,94.2) 63.208,94.141 65.991,94.141 66.5,94.65 ; 95.025,89.975 95.5,89.5 ; 96.25,74.85 R2.1 108.85,76.2 113.65,76.2 ; 96.25,74.85 95.975,75.125 U2.8 U2.9 U2.10 U2.11 U2.12 96.9,81 96.9,81.75 v1@97.075,81.925 ; 121.008,88.85 121.008,90.5
  Top Layer w0.3: 60.15,61.4 63.744,64.994
  Top Layer w0.6: 60.15,61.4 C13.1 C14.1 C15.1 C16.1 C17.1 60.15,45.85 65.05,40.95 82.649,40.95 P2.1 P5.1 P4.1 P3.1 P6.1@100.858,41.962 ; P6.1 102.02,40.8 124,40.8 126.382,43.182 P1.2 131.55,51.035 v5@131.55,61.075 ; v5(131.65,61.175) C8.2@131.65,66.525 ; C8.2@131.825,66.7 131.825,77.8 131.9,77.875 J1.6@131.9,85.034
  Top Layer w1: U4.1@101.2,62.575 101.2,56.3 103.45,54.05 U3.2@111.5,54.05
  Bottom Layer w0.254: v1(63.15,94.2) 63.15,95.95 64.95,97.75 v1(68.125,97.75) ; P8.3 79.397,107.796 80.628,109.027 v1(84,109.027) ; v1(80.75,97.8) 80.75,97.75 81.8,96.7 v1(81.8,96) ; v1(87,96.875) v1(90.75,96.875) 87.075,93.2 v1(87.1,93.2) ; v1(87.1,110.75) 87.1,110.5 87.7,109.9 ; v1(89.75,78.8) 90.8,79.85 90.8,83.2 93.6,83.2 93.75,83.05 ; P10.2 91.9,115.09 91.9,112.85 88.95,109.9 87.7,109.9 ; v7(93.75,85.3) 93.75,83.05 ; v1(97.3,82.15) 96.65,82.8 94,82.8 93.75,83.05 ; v1(99.4,63.45) 99.4,68.6 v1(100.95,70.15) ; v1(100,95.625) 100,96.125 98.2,97.925 98.2,98.85 95.525,101.525 92.8,104.25 v1(92.8,104.8) 87.7,109.9 ; v1(114.25,91.75) v1(117.5,91.75)
  Bottom Layer w0.8: U3.2 124.75,54.1 131.65,61 v5(131.65,61.175)
GYRO_CS: U2.5 U6.52 | length 35.2
  Top Layer w0.254: U6.52@83.632,103.068 U6.52 84.416,102.28 84.416,101.334 v1(84.5,101.25) ; v1(92.6,76.9) 93.4,76.9 94.025,77.525 U2.5
  Bottom Layer w0.254: v1@84.55,101.25 v1(84.5,101.25) 85.034,100.717 85.034,99.846 85,99.813 85,79.5 87.65,76.85 92.55,76.85 v1(92.6,76.9)
JTDI: P8.8 U6.50 | length 12
  Top Layer w0.254: P8.8 75.75,104.149 77.036,105.435 78.166,105.435 78.832,104.769 79.852,104.769 80.275,105.192 82.906,105.192 U6.50 U6.50@84.241,103.768
JTDO: P8.6 U6.55 | length 5.9
  Top Layer w0.254: P8.6 80.374,104.204 U6.55
JUM: U5.3 U5.11 | length 9.8
  Top Layer w0.254: v1(109.6,89.95) 109.75,89.95 110.475,89.225 U5.11 ; v1(110.4,94.15) 110.45,94.15 110.725,94.425 U5.3
  Bottom Layer w0.254: v1(109.6,89.95) 109.6,93.35 v1(110.4,94.15)
LED2: R20.1 U6.4 | length 28.6
  Top Layer w0.254: v1(70,112.15) R20.1 ; v1(77.75,93) 78.303,93 U6.4
  Bottom Layer w0.254: v1(70,112.15) 70,104.84 68.834,103.674 68.834,101.143 76.977,93 v1(77.75,93)
LED3: R21.1 U6.33 | length 23.5
  Top Layer w0.254: v1(80,112) R21.1 ; U6.33@92.636,98.802 94.15,100.316 v1(94.15,100.45)
  Bottom Layer w0.254: v1(80,112) 84.15,112 94.15,102 v1(94.15,100.45)
LED4: R22.1 U6.37 | length 22.8
  Top Layer w0.254: v1(77.5,112) 77.5,112.8 ; U6.37 92.5,101.522 v1(92.5,101.75) v1@92.528,101.75
  Bottom Layer w0.254: v1(77.5,112) 77.5,111.5 77.75,111.25 83.682,111.25 92.5,102.432 v1(92.5,101.75)
LED_RX: R19.1 U6.3 | length 27.6
  Top Layer w0.254: v1(72.5,112.15) R19.1 ; v1(77.75,94.25) 78.871,94.25 U6.3
  Bottom Layer w0.254: v1(72.5,112.15) 72.5,106.622 69.342,103.464 69.342,101.354 76.446,94.25 v1(77.75,94.25)
LED_TX: R18.1 U6.2 | length 26.9
  Top Layer w0.254: v1(75,112.15) R18.1 ; v1(77.75,95.25) 78,95 78.902,95 U6.2
  Bottom Layer w0.254: v1(75,112.15) 75,108.403 69.85,103.253 69.85,102.064 70.273,101.641 70.273,101.141 76.164,95.25 v1(77.75,95.25)
MISO: U1.7 U2.4 U6.35 | length 38.6
  Top Layer w0.254: v1(90.875,98.375) 90.875,98.496 U6.35 ; U2.4 95.225,79.025 v1(95.35,79.15) ; U1.7 95,87.25 95.375,86.875 v1(96.375,86.875)
  Bottom Layer w0.254: v1(90.875,98.375) 92,98.375 94,96.375 96.25,96.375 101.375,91.25 101.375,90.125 98.125,86.875 ; v1(95.35,79.15) 97.95,79.15 98.75,79.95 98.75,86.25 98.125,86.875 ; v1(96.375,86.875) 98.125,86.875
MOSI: U1.6 U2.3 U6.36 | length 39.8
  Top Layer w0.254: v1@89.896,99.229 v1(89.875,99.25) 90.947,99.25 U6.36 ; U2.3 93.975,79.675 v1(94.7,80.4) ; U1.6@94.479,88.6 94.479,87.053 95.165,86.367 95.633,86.367 96,86 v1(97.55,86) 97.55,86.8 99.5,88.75 v1(99.5,89.375)
  Bottom Layer w0.254: v1(89.875,99.25) 89.875,98 90.125,97.75 91.907,97.75 93.79,95.867 96.04,95.867 100.867,91.04 100.867,90.617 99.625,89.375 v1(99.5,89.375) ; v1(94.7,80.4) 97.4,80.4 98.242,81.242 98.242,85.8 98.042,86 v1(97.55,86)
NetB1_1: B1.1 J1.1 P7.4 | length 31.8
  Top Layer w0.254: B1.1@119.65,83.7 121.3,83.7 124.1,86.5 124.1,87.4 v1(125.25,88.55) 126.184,87.616 128.845,87.616 128.929,87.7 J1.1@129.46,87.7
  Bottom Layer w0.254: v1(125.25,88.55) 125.25,101.58 128.21,104.54 P7.4
NetC5_2: C5.2 C6.1 U2.14 | length 14.8
  Top Layer w0.254: U2.14 95.325,82.316 96.109,83.1 101.8,83.1 C5.2 104.5,79.5 104.2,79.2 103.15,79.2 102.8,78.85 C6.1
NetC6_2: C6.2 R1.1 | length 19.9
  Top Layer w0.254: v4(87.75,75.5) 87.757,75.507 R1.1 ; v1(104.4,76.65) 104.5,76.75 C6.2
  Bottom Layer w0.254: v4(87.75,75.5) 103.25,75.5 v1(104.4,76.65)
NetC11_1: C11.1 D2.1 D3.1 F2.1 Q2.3 R6.1 | length 28.4
  Top Layer w0.254: Q2.3@70.95,53.39 Q2.3 Q2.3@73.31,54.05
  Top Layer w1: v2(84,66.35) v1(85.25,66.35) v2(86.5,66.35)
  Top Layer w2: F2.1 Q2.3@70.95,53.39 ; Q2.3@73.31,54.05 D3.1 85.25,54.05 v2(87,54.05)
  other v2: 86.95,52.4 85.3,52.5 88.55,52.6 89.7,52.6 90.9,52.6 90.9,53.7 88.55,53.75 89.7,53.75 85.25,53.9 88.5,54.9 89.6,54.9 85.3,55.3
NetC11_2: C11.2 Q1.2 Q2.1 R4.1 | length 12.5
  Top Layer w0.254: Q1.2 Q1.2@76.85,69.5 ; R4.1@79.4,69.25 R4.1
  Top Layer w0.8: Q2.1 75.25,64.75 83.9,64.75 C11.2 ; Q1.2@76.85,69.5 R4.1
NetC12_1: C12.1 D3.2 R6.2 | length 9.1
  Top Layer w0.8: D3.2 82,60.25 82.75,61 C12.1 83.65,61.8 R6.2
NetC20_2: C20.2 U5.4 U5.17 | length 18.3
  Top Layer w0.254: U5.4 115.075,93.775 ; U5.17 117.875,88.575 116.767,89.684 116.767,92.133 115.125,93.775 115.075,93.775 ; C20.2 117.95,98.3 115.95,96.3 115.95,94.65 115.075,93.775
NetC21_1: C21.1 U5.2 | length 4.8
  Top Layer w0.254: C21.1 108.425,95.075 U5.2
NetC22_1: C22.1 U6.5 Y1.1 | length 19.3
  Top Layer w0.254: Y1.1 65.704,84.952 C22.1 74.67,88.649 U6.5
NetC23_1: C23.1 U6.6 Y1.2 | length 18.3
  Top Layer w0.254: Y1.2 69.606,81.204 C23.1 73.7,85.298 73.7,86.978 73.718,86.978 U6.6
NetD1_2: D1.2 R2.2 | length 4.2
  Top Layer w0.254: R2.2 108.775,73.15 110.375,74.75 D1.2
NetD4_2: D4.2 R18.2 | length 2.4
  Top Layer w0.254: 75,114.35 R18.2 D4.2
NetD5_2: D5.2 R19.2 | length 2.4
  Top Layer w0.254: 72.5,114.35 R19.2 D5.2
NetD6_2: D6.2 R20.2 | length 2.4
  Top Layer w0.254: 70,114.35 R20.2 D6.2
NetD7_2: D7.2 R21.2 | length 2.4
  Top Layer w0.254: 80,114.35 R21.2 D7.2
NetD8_2: D8.2 R22.2 | length 2.2
  Top Layer w0.254: 77.5,114.5 D8.2
NetEF1_1: EF1.1 U4.3@66.625,73.77 U4.5 | length 13.5
  Top Layer w0.254: EF1.1 65.15,66.25 63.3,68.1 63.3,70.15 64.38,71.23 U4.5 67.48,71.23 68,71.75 68,73 67.23,73.77 U4.3@66.625,73.77
NetEF1_5: EF1.5 R23.1 R24.1 | length 28.6
  Top Layer w0.254: R23.1 65.1,54.65 64.2,54.65 64.2,61.9 65.15,62.85 EF1.5 ; v2@66.3,54.7 v2(66.35,54.65)
  Top Layer w0.6: R23.1 v2@66.3,54.7 ; v2(79.05,49.75) R24.1
  Bottom Layer w0.6: v2(66.35,54.65) 71.15,54.65 76.05,49.75 v2(79.05,49.75)
NetLS1_2: LS1.2 LS1.2A Q3.3 | length 8.7
  Top Layer w0.254: Q3.3 98.45,111.05 LS1.2 98.45,113.51 100.86,113.51 LS1.2A@101.1,113.75
NetP9_1: P9.1 R3.2 | length 15.4
  Top Layer w0.254: R3.2 65.05,74.7 65.05,77.25 65.59,77.79 P9.1
NetP9_2: P9.2 Q1.1 R5.2 | length 12.9
  Top Layer w0.254: P9.2 76.9,75.25 80.3,78.65 R5.2
  Bottom Layer w0.4: v2(74.55,69.9) 74.55,74.3 P9.2
NetQ3_1: Q3.1 R17.1 | length 2
  Top Layer w0.254: R17.1 94.9,106.25 Q3.1
NetR7_2: R7.2 R8.1 | length 5.3
  Top Layer w0.254: R8.1 66.15,101.25 67.85,102.95 67.85,104.5 R7.2
NetR12_1: R12.1 U5.1 | length 5.1
  Top Layer w0.254: R12.1 109.125,95.725 U5.1
NetR13_1: R13.1 U5.5 | length 5.1
  Top Layer w0.254: R13.1 108.975,93.125 U5.5
PC_RXD: R12.2 U6.30 | length 25.6
  Top Layer w0.254: v1(88.125,97.75) 89.617,96.258 91.121,96.258 U6.30 ; v1(94.25,97.4) 94.325,97.4 94.725,97 R12.2
  Bottom Layer w0.254: v1(88.125,97.75) 88.125,98.875 89.25,100 91.65,100 v1(94.25,97.4)
PC_TXD: R13.2 U6.29 | length 16.9
  Top Layer w0.254: U6.29 92.447,94.25 v1(92.5,94.25) ; v1(99.95,90.8) 100.3,90.8 101.5,92 R13.2
  Bottom Layer w0.254: v1(92.5,94.25) 96.5,94.25 v1(99.95,90.8)
RESET: C21.2 C26.2 R14.2 S1.1 U6.7 | length 75
  Top Layer w0.254: R14.2 59.25,110.7 59.05,110.5 59.05,106.249 S1.1 65.405,96.206 70.919,96.206 75.125,92 v1(76.25,92) ; v1(80.5,92.25) 80.5,93.078 U6.7 ; U6.7@81.492,94.034 U6.7 ; v1(86.937,95.75) 83.172,95.75 U6.7 ; v1(97.75,89.125) 99,90.375 99,90.887 99.646,91.533 99.881,91.769 100.394,91.769 103.125,94.5 C21.2
  Bottom Layer w0.254: v1(76.25,92) 80.25,92 v1(80.5,92.25) ; v1(86.937,95.75) 86.875,95.75 86.133,95.008 86.133,93.32 86.116,93.304 86.116,90.759 88.875,88 92.25,88 93.375,89.125 v1(97.75,89.125)
RXD_TTL: R8.2 R9.1 U4.6 | length 111.2
  Top Layer w0.254: v1(64.9,69.9) 64.96,69.96 U4.6 ; v1(67.5,98.75) 67.85,99.1 R8.2 69.25,101.4 69.25,110.75 69.75,111.25 80.375,111.25 85.875,116.75 111.7,116.75 115.95,112.5 115.95,110 115.1,109.15 R9.1
  Bottom Layer w0.254: v1(64.9,69.9) 62.25,69.9 58.2,73.95 58.2,94.45 63.35,99.6 66.65,99.6 v1(67.5,98.75)
SCK: U1.4 U2.2 U6.34 | length 25.3
  Top Layer w0.254: v1(91.75,82) 91.45,82.3 91.45,85.825 92.5,86.875 v1(92.5,89.5) U1.4 ; v1(91.825,80.325) U2.2 ; U6.34 91.5,98.402 91.5,98.138 92.138,97.5 92.75,97.5 94.75,95.5 v1(94.75,93.25)
  Bottom Layer w0.254: v1(91.75,82) 91.825,81.925 v1(91.825,80.325) ; v1(92.5,89.5) 92.5,91.875 93.875,93.25 v1(94.75,93.25)
SWCLK: P8.4 U6.49 | length 6.1
  Top Layer w0.254: P8.4 79.642,105.7 83.116,105.7 U6.49
TTL_DATA: P2.3 P3.3 P4.3 P5.3 P6.3 R24.2 | length 20.5
  Top Layer w0.254: P6.3@100.858,47.042 P6.3
  Top Layer w0.6: R24.2 81.808,47.042 P2.3
  Top Layer w1: P2.3 P5.3 P4.3 P3.3 P6.3@100.858,47.042
UART5_RX: P10.3 U6.54 | length 18.6
  Top Layer w0.254: v1(81.35,104.4) 81.35,103.91 U6.54 ; v1(85.25,107) 87,107 89.35,109.35 P10.3
  Bottom Layer w0.254: v1(81.35,104.4) 81.35,104.55 83.8,107 v1(85.25,107)
UART5_TX: P10.4 U6.53 | length 17.6
  Top Layer w0.254: v1(82.55,104.3) 82.55,103.429 U6.53 ; v1(84.75,105.6) 84.1,106.25 84.1,107.4 84.85,108.15 86.8,108.15 87.9,109.25 87.9,111.12 86.81,112.21 P10.4
  Bottom Layer w0.254: v1(82.55,104.3) 83.85,105.6 v1(84.75,105.6)
USB_POW: B1.2 B2.2 C19.2 U5.20 | length 16.8
  Top Layer w0.254: C19.2 116.75,80.6 B2.2 B1.2 v1(116,84) ; v1(117.6,90.45) 117.656,90.506 119.531,90.506 U5.20
  Bottom Layer w0.254: v1(116,84) 116,88.85 v1(117.6,90.45)
USB_SLEEP: P8.2 U5.12 U6.46 | length 40.8
  Top Layer w0.254: U6.46 88.971,104.35 v1(89.05,104.35) ; v1(107.95,88.4) 108.125,88.575 U5.12
  Bottom Layer w0.254: P8.2 85.604,107.796 v1(89.05,104.35) 105,88.4 v1(107.95,88.4)
USBDM: J1.2 P7.3 R10.2 U5.16 | length 46.5
  Top Layer w0.254: U5.16 121.175,87.925 121.1,88 v1(120.95,88) ; v4(122.5,90.5) R10.2 ; v1(126.85,88.35) J1.2@128.929,88.35
  Bottom Layer w0.254: v1(120.95,88) 121.25,88 121.5,88.25 121.5,89.5 v4(122.5,90.5) 123.25,89.75 123.25,83.8 122,82.55 122,81.3 122.95,80.35 124,80.35 126.85,83.2 v1(126.85,88.35) 126.35,88.85 126.35,100.25 128.1,102 P7.3
USBDP: J1.3 P7.2 R11.2 U5.15 | length 37.9
  Top Layer w0.254: U5.15 119.559,87.266 121.254,87.266 ; v4(121.55,86.05) 121.55,86.97 121.254,87.266 ; R11.2@122.5,87 R11.2 122.375,87.275 121.262,87.275 121.254,87.266 ; v1(127.4,89.45) 127.819,89.031 J1.3@128.929,89.031
  Bottom Layer w0.254: v4(121.55,86.05) 121.492,85.992 121.492,81.09 122.74,79.842 124.608,79.842 127.8,83.034 127.8,89.05 v1(127.4,89.45) 127.4,98.4 128.46,99.46 P7.2
VCC: B2.1 C8.1 C18.2 LS1.1 LS1.1A P10.1 R9.2 R23.2 U3.3 U4.3@105.8,62.575 U4.14 | length 201
  Top Layer w0.254: R23.2 66.35,56.4 v2(66.4,56.35) ; v2@73.49,76.31 v2(73.5,76.3) ; v5(105.75,60.1) v5@105.8,60.15 ; LS1.1A@107.6,113.75 110.01,113.75 110.25,113.51 LS1.1 110.25,112.05 v3(111.5,110.8) 113.65,110.8 R9.2
  Top Layer w0.5: U4.14 v2@73.49,76.31
  Top Layer w0.6: C18.2 B2.1 122.75,81.5 v3(123.125,81.875) 125.725,81.875 128.05,79.55 128.05,70.475 ; C8.1@124.275,66.7 128.05,70.475 ; 128.05,70.45 128.05,70.475
  Top Layer w1: v5@105.8,60.15 105.8,62.575 108.855,62.575 111.5,59.93 U3.3 111.55,56.59 116.46,56.59 124.3,64.43 C8.1@124.3,66.7
  Bottom Layer w0.254: P10.1 94.43,112.32 95.95,110.8 v3(111.5,110.8)
  Bottom Layer w0.4: v2(66.4,56.35) 67.45,57.4 67.45,67.55 68.1,68.2 72.9,68.2 73.5,68.8 v2(73.5,76.3) 73.5,79.2 74.25,79.95 77.2,79.95 77.9,79.25 77.9,75.15 83.75,69.3 89.75,69.3 99.9,59.15 104.8,59.15 v5(105.75,60.1)
  Bottom Layer w0.6: v3(111.5,110.8) 119.425,110.8 119.625,111 124.25,106.375 124.25,83 v3(123.125,81.875)
VCC_IN: F1.1 P1.1 | length 7.7
  Top Layer w0.254: F1.1@114.59,46 F1.1@115.46,45.13 ; P1.1@119.33,45 P1.1
  Top Layer w4: F1.1 P1.1@119.33,45
  other v2: 115.75,43.5 116.75,43.5 115.75,45 116.75,45 115.75,46.5 116.75,46.5
VDD: C7.1 C12.2 D2.2 F1.2 Q2.2 R4.2 U3.1 | length 79.5
  Top Layer w0.254: F1.2 106.95,46.55 106.95,47
  Top Layer w0.8: R4.2 82.75,67.85 87.65,67.85 88.25,67.25 88.25,63.9 C12.2 87,59.35 D2.2
  Top Layer w2: D2.2 89.55,57.95 94,53.5 100,53.5 F1.2@106.95,46.55 ; 106.95,47 111.5,51.55 119,51.55 C7.1@122.325,54.875
  Bottom Layer w0.254: v2(71.1,62.1) 73.3,59.9 85.1,59.9
  other v1: 86.6,57.3 87.55,57.3 87.55,58.5 86.6,58.55
  other v2: 88.079,56.621 85.5,56.75 85.5,58 85.5,59.45 86.65,59.95 87.85,59.95 71.1,63.1 68.8,64 71.1,64 68.8,65 71.1,65 68.9,66 71.1,66 68.9,67.1 71.1,67.1
VDD_DXL: C13.2 C14.2 C15.2 C16.2 C17.2 F2.2 P2.2 P3.2 P4.2 P5.2 P6.2 | length 34.5
  Top Layer w0.254: P2.2 P2.2 ; P6.2@101.058,44.5 P6.2@101.06,44.502
  Top Layer w1: C17.2 v2(61.85,50.75) C16.2 v2(61.85,53.25) C15.2 v2(61.85,56) C14.2 v2(61.85,58.75) C13.2
  Top Layer w2: F2.2 P2.2 v3(86,44.5) v3(90.5,44.5) v3(94.75,44.5) v3(99,44.5) P6.2@101.058,44.5
  Bottom Layer w0.254: P2.2 P2.2 ; P5.2 P5.2 ; P4.2 P4.2 P4.2@92.299,44.5 ; P3.2 P3.2@96.617,44.5
  other v2: 80.45,43.55 81.6,44.45 80.4,45.35 62.55,46.95 61.7,47.95 62.75,48
VDDA: B3.1 C25.2 U6.13 | length 10
  Top Layer w0.254: C25.2 79.197,87.5 ; B3.1 79.197,87.5 ; U6.13 79.197,87.5
VSSA: B4.1 C25.1 U6.12 | length 13.8
  Top Layer w0.254: B4.1 76.2,87.4 C25.1 76.3,88.65 77.65,90 80.979,90 U6.12
pads on no net: EF1.3 EF1.4 J1.4 P8.7 S1.2 S1.4 S2.2 S2.4 S3.2 S3.4 U1.2 U1.3 U1.9 U1.11 U2.6 U2.7 U4.8 U4.9 U4.10 U4.11 U4.12 U4.13 U5.6 U5.8 U5.9 U5.10 U5.13 U5.14 U5.19 U5.22 U5.23 U5.24 U5.27 U5.28 U6.8 U6.9 U6.10 U6.11 U6.14 U6.15 U6.16 U6.17 U6.20 U6.21 U6.22 U6.23 U6.24 U6.25 U6.26 U6.27 U6.38 U6.39 U6.40 U6.41 U6.42 U6.44 U6.45
copper on no net: | length 0

## Polygon pours and split planes (outlines as drawn)
VDD on Top Layer "Top_VDD" (solid, pour order 50): 84.75,60.5 84.75,56.25 90,56.25 90,59 88.5,60.5
NetC11_1 on Top Layer "Top_NetC11_1" (solid, pour order 64): 84.7,55.8 84.7,52 91.5,52 91.5,53.8 89.5,55.8
VDD on Top Layer "Top_VDD" (solid, pour order 54): 71.25,67.5 71.5,67.25 71.5,61.75 70.25,61.75 68.5,63.5 68.5,67.5
VDD_DXL on Top Layer "Top_VDD_DXL" (solid, pour order 40): 61.25,47.5 61.25,61 62.5,61 62.5,49 64,47.5 63.75,47.5 62.5,46.25
NetC11_2 on Top Layer "Top_NetC11_2" (solid, pour order 60): 75.5,71 77.5,71 77.5,63 77,62.5 74,62.5 73.5,63 73.5,67.5 74.5,68.5 75.5,68.5
NetC11_1 on Top Layer "Top_VDD_DXL" (solid, pour order 98): 84.7,55.8 67.75,55.8 67.65,55.7 67.65,41.6 73.4,41.6 74,42.2 74,47.2 78.8,52 84.7,52
VDD_DXL on Top Layer "Top_VDD_DXL" (solid, pour order 36): 74.5,47 74.5,42 80,42 80,42.25 81,43.25 82.25,43.25 82.25,45.75 81,45.75 80,46.75 80,47
no net on Top Layer "Top Cover" (solid, pour order 134): 55,120 135,120 135,40 55,40 55,120
VCC_IN on Bottom Layer "Bottom_VCC_IN" (solid, pour order 46): 121.25,49.25 116.25,49.25 115,48 115,42 116.25,40.75 121.25,40.75
VDD on Bottom Layer "Bottom_VDD" (solid, pour order 52): 88.5,61 88.5,56.25 75.75,56.25 68.5,63.5 68.5,67.5 71.25,67.5 71.5,67.25 71.5,63.5 74,61
NetC11_1 on Bottom Layer "Top_NetC11_1" (solid, pour order 74): 84.7,52 84.7,55.8 89.3,55.8 93.5,60 88,65.5 82.6,65.5 82.6,67.4 82.5,67.5 90,67.5 97,60.5 97,57.5 91.5,52
VDD_DXL on Bottom Layer "Bottom_VDD_DXL" (solid, pour order 38): 102.5,45.75 102.5,43.25 81,43.25 79.75,42 66.75,42 61.25,47.5 61.25,61 62.5,61 62.5,49 64.5,47 80,47 80,46.75 81,45.75
no net on Bottom Layer "Bottom Cover" (solid, pour order 136): 55,120 135,120 135,40 55,40

## Keep-outs
Keep-Out Layer:
  the board outline again, w0.254

## Silkscreen, mask and mechanical layers (free items; w line width, h text height)
Top Overlay:
  region: 121.221,107.827 ccw(c120.3,110.049) 121.575,108.009 122.455,107.292 123.058,107.895 122.341,108.775 ccw(c120.3,110.05) 122.645,109.509 123.774,109.624 123.774,110.476 122.645,110.591 ccw(c120.3,110.05) 122.341,111.325 123.058,112.205 122.455,112.808 121.575,112.091 ccw(c120.3,110.05) 120.841,112.395 120.726,113.524 119.874,113.524 119.759,112.395 ccw(c120.3,110.05) 119.025,112.091 118.145,112.808 117.542,112.205 118.259,111.325 ccw(c120.3,110.05) 117.955,110.591 116.826,110.476 116.826,109.624 117.955,109.509 ccw(c120.3,110.05) 118.259,108.775 117.542,107.895 118.145,107.292 119.025,108.009 ccw(c120.3,110.049) 119.379,107.827 119.881,109.04 cw(c120.3,110.05) 119.206,110.05 cw(c120.3,110.05) 120.719,109.04
  text "POLIBATAM" at 112,116.55 h2
  text "AXELERIA V1.4" at 99.6,102.75 h2

## Text inside footprints (layer, text, board x,y; h text height)
P8: Top Overlay "10" at 72.2,97.65 h1.27 r45; Top Overlay "9" at 70.5,100.15 h1.27 r45; Top Overlay "1" at 81.25,110.4 h1.27 r45; Top Overlay "2" at 83,108.6 h1.27 r45
U6: Top Overlay "1" at 78.816,95.704 h0.63 r45